# EAGLE board Power module (EAGLE 9.3.1)
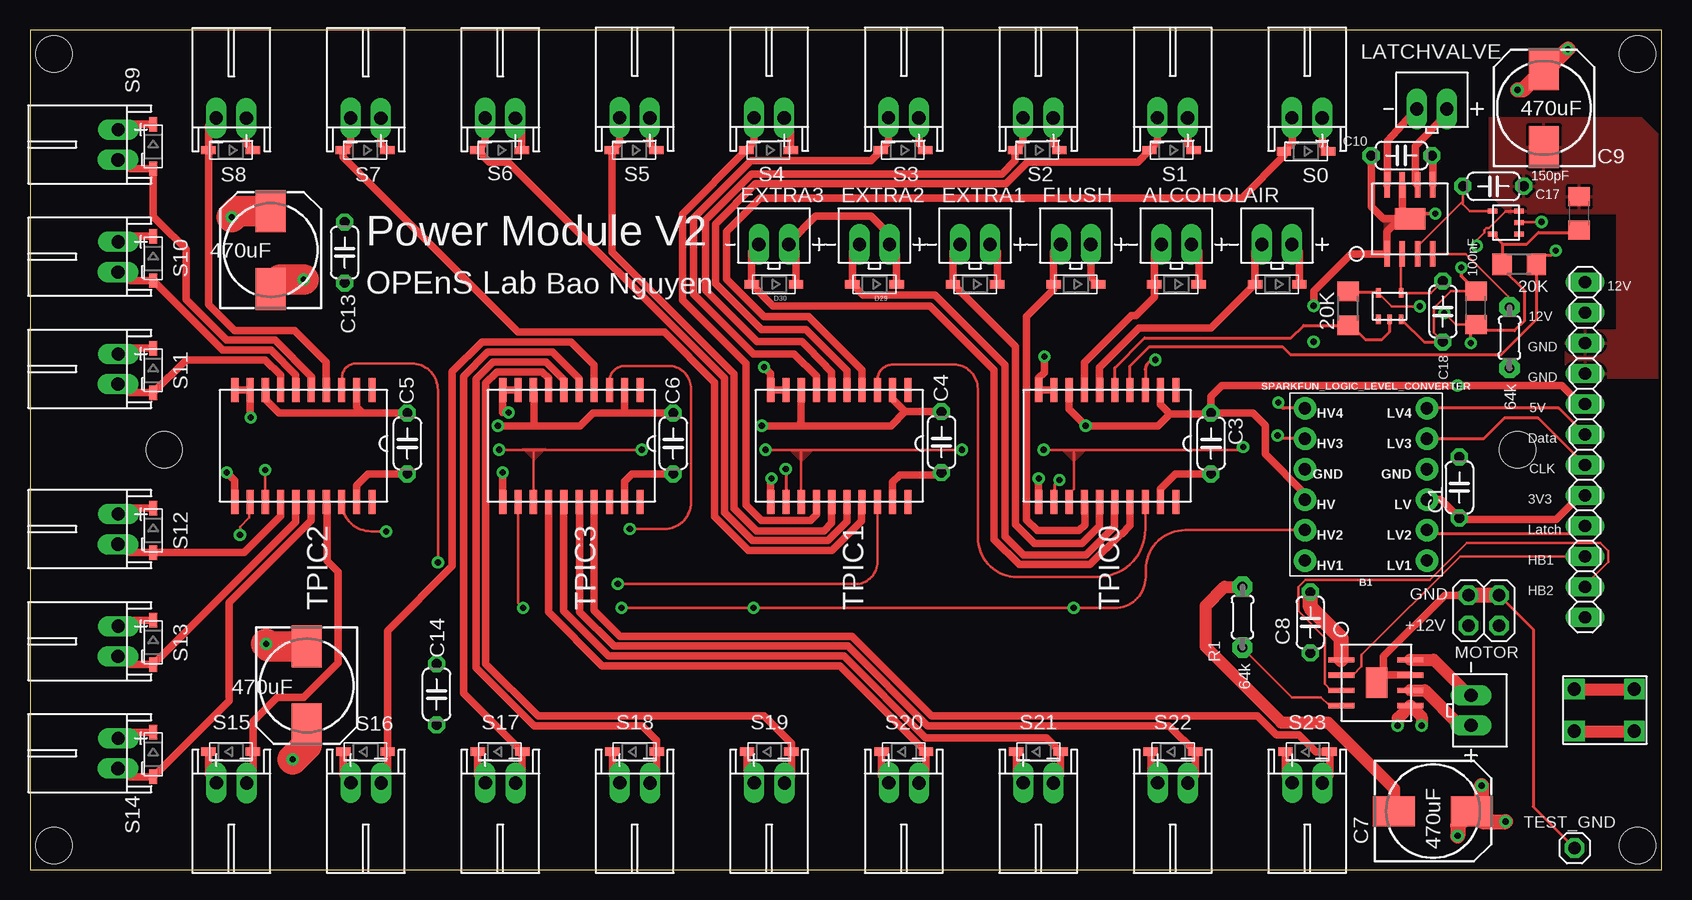
[diagram p0: board, top side]
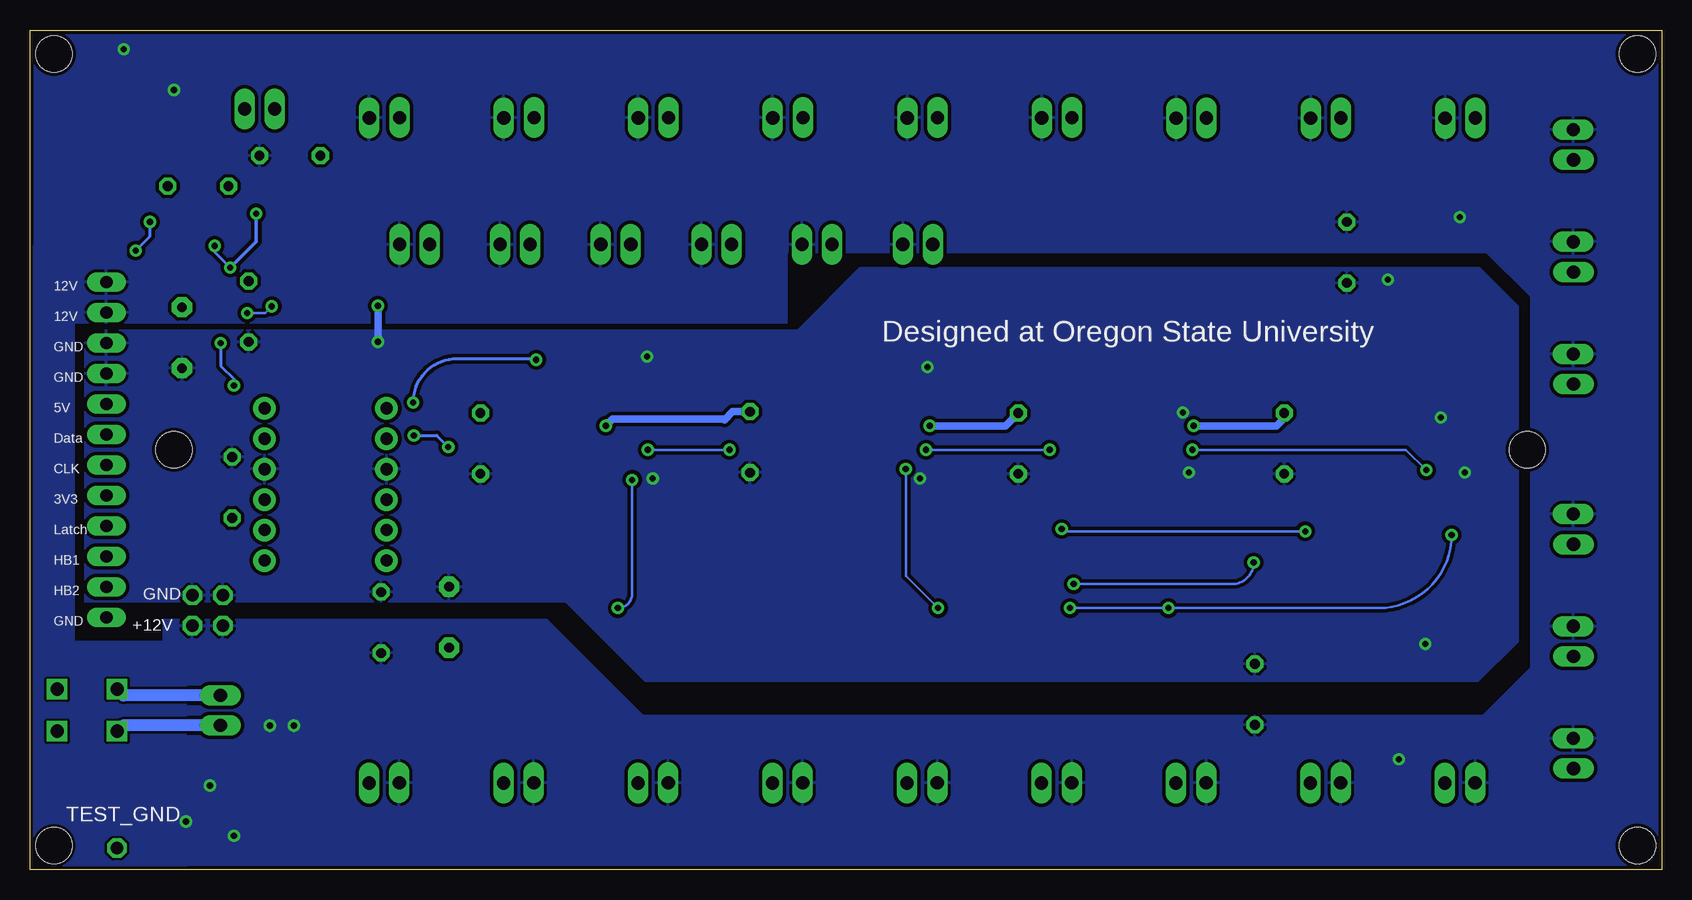
[diagram p1: board, bottom side, seen from below]

Size 136 x 70 mm. Coordinates in mm from the lower left corner, seen from the top.
Outline: 0,0 136,0 136,70 0,70 0,0
Copper layers (1*16): Top 0.035mm / dielectric 1.5mm / Bottom 0.035mm
Design rules "SparkFun": minimum track width 8mil, minimum drill 20mil, track to track 8mil, track to pad 8mil, pad to pad 8mil, via to via 8mil, smd to smd 8mil, copper to edge 10mil, drill to drill 8mil, minimum pad ring 12mil, minimum via ring 10mil, stop-mask expansion 4mil, vias tented up to drill 25mil, thermal gap 10mil
Holes 3 mm at 134,68 134,2 2,2 2,68 11.2,35 124,35

## Footprints (pad centres in the part's own frame; a part is rotated, then mirrored left to right if it is on the bottom)
JST_2POS_2.5MM_UP = drill 1.1 long: 1 -1.25,0; 2 1.25,0
SPARKFUN_LOGIC_LEVEL_CONVERTER = drill 1.016 pad 1.88: GND1 -5.08,-1.27; GND2 5.08,-1.27; HV 5.08,1.27; HV1 5.08,6.35; HV2 5.08,3.81; HV3 5.08,-3.81; HV4 5.08,-6.35; LV -5.08,1.27; LV1 -5.08,6.35; LV2 -5.08,3.81; LV3 -5.08,-3.81; LV4 -5.08,-6.35
C050-024X044 = drill 0.813 octagon: 1 -2.54,0; 2 2.54,0
140CLH-0810 = smd 3.5 x 2.5: + 3.25,0; - -3.25,0
C1206 = smd 1.6 x 1.8: 1 -1.4,0; 2 1.4,0
SOD-123 = smd 1.2 x 0.7: A 1.85,0; C -1.85,0
SOP8 = smd 2.15 x 0.45: 1 -2.54,1.27; 2 -2.54,0; 3 -2.54,-1.27; 4 -2.54,-2.54; 5 3.21,-2.54; 6 3.21,-1.27; 7 3.21,0; 8 3.21,1.27 | smd 1.79 x 2.541: GND 0.381,-0.635
1X12 = drill 1.016 long: 1 -13.97,0; 2 -11.43,0; 3 -8.89,0; 4 -6.35,0; 5 -3.81,0; 6 -1.27,0; 7 1.27,0; 8 3.81,0; 9 6.35,0; 10 8.89,0; 11 11.43,0; 12 13.97,0
2X02 = drill 1.016 octagon: 1 -1.27,-1.27; 2 -1.27,1.27; 3 1.27,-1.27; 4 1.27,1.27
SOT753 = smd 0.8 x 0.4: 1 -1.14,0.95; 2 -1.14,0; 3 -1.14,-0.95; 4 1.06,-0.95; 5 1.06,0.95
0204/5 = drill 0.813 pad 1.676 octagon: 1 -2.54,0; 2 2.54,0
R1206 = smd 1.6 x 1.803: 1 -1.422,0; 2 1.422,0
JST_2POS_2.5MM_ANGLE = drill 1.1 long: 1 1.25,0; 2 -1.27,0.02
1X01 = drill 1.016 octagon: 1 0,0
DIP20 = smd 2 x 0.6: 1 -3.81,5.08; 2 -3.81,3.81; 3 -3.81,2.54; 4 -3.81,1.27; 5 -3.81,0; 6 -3.81,-1.27; 7 -3.81,-2.54; 8 -3.81,-3.81; 9 -3.81,-5.08; 10 -3.81,-6.35; 11 5.49,-6.35; 12 5.49,-5.08; 13 5.49,-3.81; 14 5.49,-2.54; 15 5.49,-1.27; 16 5.49,0; 17 5.49,1.27; 18 5.49,2.54; 19 5.49,3.81; 20 5.49,5.08
3.5MM_DIP2 = drill 1.1 square: 1 -1.778,2.611; 2 -1.778,-2.389; 3 1.722,-2.389; 4 1.722,2.611

## Placement (x,y rotation side)
AIR  2.5MM_JST_UP_2POS  [JST_2POS_2.5MM_UP]  103.95,52.12 0 top
ALCOHOL  2.5MM_JST_UP_2POS  [JST_2POS_2.5MM_UP]  95.56,52.12 0 top
B1  SPARKFUN_LOGIC_LEVEL_CONVERTER  [SPARKFUN_LOGIC_LEVEL_CONVERTER]  111.36,32.11 180 top
C1  100nF  [C050-024X044]  119.15,31.85 90 top
C3  100nF  [C050-024X044]  98.45,35.53 270 top
C4  100nF  [C050-024X044]  75.98,35.63 270 top
C5  100nF  [C050-024X044]  31.45,35.53 270 top
C6  100nF  [C050-024X044]  53.62,35.53 270 top
C7  470uF  [140CLH-0810]  116.95,4.87 0 top
C8  100nF  [C050-024X044]  106.73,20.59 90 top
C9  470uF  [140CLH-0810]  126.2,63.5 90 top
C10  100nF  [C050-024X044]  114.33,59.53 180 top
C11  100nF  [C1206]  120.53,46.83 90 top
C12  100nF  [C1206]  129.13,54.71 90 top
C13  100nF  [C050-024X044]  26.23,51.45 90 top
C14  100nF  [C050-024X044]  33.89,14.6 270 top
C15  470uF  [140CLH-0810]  20.07,51.65 90 top
C16  470uF  [140CLH-0810]  23.07,15.35 270 top
C17  150pF  [C050-024X044]  121.99,56.97 0 top
C18  150pF  [C050-024X044]  117.77,46.53 270 top
D1  [SOD-123]  106.37,59.88 180 top
D2  [SOD-123]  95.17,59.98 180 top
D3  [SOD-123]  83.96,59.98 180 top
D4  [SOD-123]  72.76,59.98 180 top
D5  [SOD-123]  61.55,59.98 180 top
D6  [SOD-123]  50.35,59.98 180 top
D7  [SOD-123]  39.15,59.98 180 top
D8  [SOD-123]  27.94,59.98 180 top
D9  [SOD-123]  16.74,59.98 180 top
D10  [SOD-123]  10.27,60.29 270 top
D11  [SOD-123]  10.27,50.95 270 top
D12  [SOD-123]  10.27,41.61 270 top
D13  [SOD-123]  10.27,28.28 270 top
D14  [SOD-123]  10.27,18.94 270 top
D15  [SOD-123]  10.27,9.6 270 top
D16  [SOD-123]  16.74,9.82 0 top
D17  [SOD-123]  27.96,9.82 0 top
D18  [SOD-123]  39.18,9.82 0 top
D19  [SOD-123]  50.4,9.82 0 top
D20  [SOD-123]  61.62,9.82 0 top
D21  [SOD-123]  72.84,9.82 0 top
D22  [SOD-123]  84.06,9.82 0 top
D23  [SOD-123]  95.28,9.82 0 top
D24  [SOD-123]  106.5,9.82 0 top
D25  [SOD-123]  103.96,48.8 180 top
D26  [SOD-123]  95.57,48.8 180 top
D27  [SOD-123]  87.18,48.8 180 top
D28  [SOD-123]  78.78,48.8 180 top
D29  [SOD-123]  70.39,48.8 180 top
D30  [SOD-123]  62,48.8 180 top
DRV8871  Motor H-Bridge  [SOP8]  111.85,16.21 0 top
DRV8871-2  Latch H  [SOP8]  114.39,53.87 90 top
EXTRA1  2.5MM_JST_UP_2POS  [JST_2POS_2.5MM_UP]  78.78,52.12 0 top
EXTRA2  2.5MM_JST_UP_2POS  [JST_2POS_2.5MM_UP]  70.39,52.12 0 top
EXTRA3  2.5MM_JST_UP_2POS  [JST_2POS_2.5MM_UP]  62,52.12 0 top
FLUSH  2.5MM_JST_UP_2POS  [JST_2POS_2.5MM_UP]  87.17,52.12 0 top
HEADER  Connect to logic  [1X12]  129.63,35 270 top
JP2  [2X02]  121.19,21.6 0 top
LATCHVALVE  Latch valve JST PH  [JST_2POS_2.5MM_UP]  116.86,63.42 0 top
MOTOR  Motor JST PH  [JST_2POS_2.5MM_UP]  120.12,13.26 270 top
NOTGATE1  [SOT753]  122.99,53.94 180 top
NOTGATE2  [SOT753]  113.34,47.01 90 top
R1  64k  [0204/5]  101.07,21.04 270 top
R2  64k  [0204/5]  123.33,44.34 90 top
R3  20K  [R1206]  124.13,50.47 0 top
R4  20K  [R1206]  109.87,46.79 270 top
S0  2.5MM_JST_ANGLE_2POS  [JST_2POS_2.5MM_ANGLE]  106.46,62.67 0 top
S1  2.5MM_JST_ANGLE_2POS  [JST_2POS_2.5MM_ANGLE]  95.25,62.67 0 top
S2  2.5MM_JST_ANGLE_2POS  [JST_2POS_2.5MM_ANGLE]  84.04,62.67 0 top
S3  2.5MM_JST_ANGLE_2POS  [JST_2POS_2.5MM_ANGLE]  72.83,62.67 0 top
S4  2.5MM_JST_ANGLE_2POS  [JST_2POS_2.5MM_ANGLE]  61.62,62.67 0 top
S5  2.5MM_JST_ANGLE_2POS  [JST_2POS_2.5MM_ANGLE]  50.42,62.67 0 top
S6  2.5MM_JST_ANGLE_2POS  [JST_2POS_2.5MM_ANGLE]  39.21,62.64 0 top
S7  2.5MM_JST_ANGLE_2POS  [JST_2POS_2.5MM_ANGLE]  28,62.64 0 top
S8  2.5MM_JST_ANGLE_2POS  [JST_2POS_2.5MM_ANGLE]  16.79,62.64 0 top
S9  2.5MM_JST_ANGLE_2POS  [JST_2POS_2.5MM_ANGLE]  7.36,60.44 90 top
S10  2.5MM_JST_ANGLE_2POS  [JST_2POS_2.5MM_ANGLE]  7.36,51.09 90 top
S11  2.5MM_JST_ANGLE_2POS  [JST_2POS_2.5MM_ANGLE]  7.36,41.74 90 top
S12  2.5MM_JST_ANGLE_2POS  [JST_2POS_2.5MM_ANGLE]  7.36,28.39 90 top
S13  2.5MM_JST_ANGLE_2POS  [JST_2POS_2.5MM_ANGLE]  7.36,19.04 90 top
S14  2.5MM_JST_ANGLE_2POS  [JST_2POS_2.5MM_ANGLE]  7.36,9.69 90 top
S15  2.5MM_JST_ANGLE_2POS  [JST_2POS_2.5MM_ANGLE]  16.79,7.23 180 top
S16  2.5MM_JST_ANGLE_2POS  [JST_2POS_2.5MM_ANGLE]  28,7.23 180 top
S17  2.5MM_JST_ANGLE_2POS  [JST_2POS_2.5MM_ANGLE]  39.21,7.23 180 top
S18  2.5MM_JST_ANGLE_2POS  [JST_2POS_2.5MM_ANGLE]  50.42,7.23 180 top
S19  2.5MM_JST_ANGLE_2POS  [JST_2POS_2.5MM_ANGLE]  61.62,7.23 180 top
S20  2.5MM_JST_ANGLE_2POS  [JST_2POS_2.5MM_ANGLE]  72.83,7.23 180 top
S21  2.5MM_JST_ANGLE_2POS  [JST_2POS_2.5MM_ANGLE]  84.04,7.23 180 top
S22  2.5MM_JST_ANGLE_2POS  [JST_2POS_2.5MM_ANGLE]  95.25,7.23 180 top
S23  2.5MM_JST_ANGLE_2POS  [JST_2POS_2.5MM_ANGLE]  106.46,7.23 180 top
TEST_GND  [1X01]  128.75,1.79 0 top
TPIC0  TPIC6B596  [DIP20]  90.43,36.15 270 top
TPIC1  TPIC6B596  [DIP20]  68.1,36.15 270 top
TPIC2  TPIC6B596  [DIP20]  23.43,36.15 270 top
TPIC3  TPIC6B596  [DIP20]  45.76,36.15 270 top
U$1  Motor Push In  [3.5MM_DIP2]  131.13,13.26 270 top

## Library data of the parts
AIR ALCOHOL DRV8871 DRV8871-2 EXTRA1-EXTRA3 FLUSH LATCHVALVE MOTOR NOTGATE1 NOTGATE2 S0 S1-S23 TPIC0 TPIC1-TPIC3 U$1 = eDNA
B1 = SparkFun-Boards
C1 C3-C18 D1-D30 HEADER R1-R4 = adafruit
JP2 TEST_GND = pinhead

## Nets
+3V3: B1.LV C1.1 HEADER.8
+5V: B1.HV C3.1 C4.1 C5.1 C6.1 C11.1 C12.1 HEADER.5 NOTGATE1.5 NOTGATE2.5 R3.1 R4.1 TPIC0.2 TPIC0.8 TPIC1.2 TPIC1.8 TPIC2.2 TPIC2.8 TPIC3.2 TPIC3.8
+12V: AIR.2 ALCOHOL.2 C7.+ C8.1 C9.+ C10.1 C13.2 C14.2 C15.+ C16.+ D1.C D2.C D3.C D4.C D5.C D6.C D7.C D8.C D9.C D10.C D11.C D12.C D13.C D14.C D15.C D16.C D17.C D18.C D19.C D20.C D21.C D22.C D23.C D24.C D25.C D26.C D27.C D28.C D29.C D30.C DRV8871-2.5 DRV8871.5 EXTRA1.2 EXTRA2.2 EXTRA3.2 FLUSH.2 HEADER.1 HEADER.2 JP2.1 JP2.3 S0.1 S1.1 S2.1 S3.1 S4.1 S5.1 S6.1 S7.1 S8.1 S9.1 S10.1 S11.1 S12.1 S13.1 S14.1 S15.1 S16.1 S17.1 S18.1 S19.1 S20.1 S21.1 S22.1 S23.1
AIR: AIR.1 D25.A TPIC0.6
ALCOHOL: ALCOHOL.1 D26.A TPIC0.7
GND: B1.GND1 B1.GND2 C1.2 C3.2 C4.2 C5.2 C6.2 C7.- C8.2 C9.- C10.2 C11.2 C12.2 C13.1 C14.1 C15.- C16.- C17.2 C18.2 DRV8871-2.1 DRV8871-2.7 DRV8871-2.GND DRV8871.1 DRV8871.7 DRV8871.GND HEADER.3 HEADER.4 JP2.2 JP2.4 NOTGATE1.3 NOTGATE2.3 R1.1 R2.1 TEST_GND.1 TPIC0.9 TPIC0.10 TPIC0.11 TPIC0.19 TPIC1.9 TPIC1.10 TPIC1.11 TPIC1.19 TPIC2.9 TPIC2.10 TPIC2.11 TPIC2.19 TPIC3.9 TPIC3.10 TPIC3.11 TPIC3.19
HB_IN1: DRV8871.2 HEADER.10
HB_IN2: DRV8871.3 HEADER.11
LATCH_H_BRIDGE2: C18.1 DRV8871-2.2 NOTGATE2.4
LATCH_H_BRIGDE1: C17.1 DRV8871-2.3 NOTGATE1.4
LATCHVALVE1: NOTGATE1.2 R3.2 TPIC0.4
LATCHVALVE2: NOTGATE2.2 R4.2 TPIC0.5
MOTOR1: DRV8871.8 MOTOR.1 U$1.1 U$1.2
MOTOR2: DRV8871.6 MOTOR.2 U$1.3 U$1.4
N$1: DRV8871-2.4 R2.2
N$2: DRV8871.4 R1.2
N$3: DRV8871-2.8 LATCHVALVE.1
N$4: DRV8871-2.6 LATCHVALVE.2
S1: D1.A S0.2 TPIC1.4
S2: D2.A S1.2 TPIC1.5
S3: D3.A S2.2 TPIC1.6
S4: D4.A S3.2 TPIC1.7
S5: D5.A S4.2 TPIC1.14
S6: D6.A S5.2 TPIC1.15
S7: D7.A S6.2 TPIC1.16
S8: D8.A S7.2 TPIC1.17
S9: D9.A S8.2 TPIC2.4
S10: D10.A S9.2 TPIC2.5
S11: D11.A S10.2 TPIC2.6
S12: D12.A S11.2 TPIC2.7
S13: D13.A S12.2 TPIC2.14
S14: D14.A S13.2 TPIC2.15
S15: D15.A S14.2 TPIC2.16
S16: D16.A S15.2 TPIC2.17
S17: D17.A S16.2 TPIC3.4
S18: D18.A S17.2 TPIC3.5
S19: D19.A S18.2 TPIC3.6
S20: D20.A S19.2 TPIC3.7
S21: D21.A S20.2 TPIC3.14
S22: D22.A S21.2 TPIC3.15
S23: D23.A S22.2 TPIC3.16
S24: D24.A S23.2 TPIC3.17
SHIFT_CLK: B1.LV3 HEADER.7
SHIFT_DATA: B1.LV4 HEADER.6
SHIFT_LATCH: B1.LV2 HEADER.9
T_DATA: B1.HV4 TPIC0.3
T_DATA1: TPIC0.18 TPIC1.3
T_DATA2: TPIC1.18 TPIC2.3
T_DATA3: TPIC2.18 TPIC3.3
T_RCK: B1.HV2 TPIC0.12 TPIC1.12 TPIC2.12 TPIC3.12
T_SCK: B1.HV3 TPIC0.13 TPIC1.13 TPIC2.13 TPIC3.13
TPIC0_4: D27.A FLUSH.1 TPIC0.14
TPIC0_5: D28.A EXTRA1.1 TPIC0.15
TPIC0_6: D29.A EXTRA2.1 TPIC0.16
TPIC0_7: D30.A EXTRA3.1 TPIC0.17

## Tracks (layer width: path | path; a pad name or v marks a point on that pad's centre or on a via)
+3V3
  Top 0.61: B1.LV 117.62,30.84 C1.1 119.26,29.2 127.24,29.2 129.23,31.19 HEADER.8
+5V  (via drill 0.51)
  Top 0.203: C11.1 118.87,45.43 v117.9,46.4 | v115.84,46.96 113.5,46.96 NOTGATE2.5
  Top 0.254: R3.1 122.79,50.57 | 122.79,50.57 122.79,52.13 | 122.79,52.13 NOTGATE1.5 | R4.1 110.17,48.09 112.37,48.09 NOTGATE2.5 | v120.1,43.9 120.1,45 C11.1 121.03,44.93 123.73,44.93 124.59,45.79 124.59,48.26 122.79,50.06 122.79,50.57 | 122.79,52.13 124.77,52.13 125.75,53.11 128.93,53.11 C12.1
  Top 0.61: C3.1 98.38,38 95,38 | 95,38 94.24,38.76 TPIC0.2 | 95,38 94,37 v88,37 86.62,38.38 TPIC0.8 | v39,37 42,37 | 42,37 45.86,37 46.93,38.07 49.6,38.07 | HEADER.5 129.23,38.81 127.68,40.36 v119,40.36 99.36,40.36 98.45,39.45 C3.1 | C4.1 72.95,38.17 | 72.95,38.17 71.91,39.21 TPIC1.2 | C6.1 50.03,38.07 49.6,38.07 | C5.1 27.73,38.07 | TPIC2.2 27.24,38.56 27.73,38.07 | v61,37 64,37 | 64,37 71.78,37 72.95,38.17 | 64,37 64.29,37.29 TPIC1.8 | TPIC2.8 19.68,39.9 19.68,39.15 20.76,38.07 27.73,38.07 | TPIC3.2 49.57,38.1 49.6,38.07 | 42,37 42,39.91 TPIC3.8 | B1.HV 106.28,31.33 102.98,34.63 102.98,37.02 101.93,38.07 C3.1
  Bottom 0.203: v117.9,46.4 116.4,46.4 v115.84,46.96
  Bottom 0.254: v120.1,43.9 120.1,42 119,40.9 v119,40.36
  Bottom 0.61: v88,37 87.45,37.55 78.15,37.55 78.1,37.5 77.43,38.17 C4.1 | v61,37 54.69,37 C6.1 | v39,37 32.1,37 31.45,37.65 C5.1
+12V  (via drill 0.51)
  Top 0.61: D10.C 8.06,62.14 S9.1 | D11.C 8.07,52.8 S10.1 | D12.C 8.08,43.46 S11.1 | D13.C 8.1,30.13 S12.1 | D14.C 8.11,20.79 S13.1 | D15.C 8.12,11.45 S14.1 | C10.1 116.93,59.47 DRV8871-2.5 | S8.1 18.04,60.53 D9.C | D8.C 29.25,60.52 S7.1 | S5.1 51.67,60.52 D6.C | S3.1 74.08,60.51 D4.C | S2.1 85.29,60.5 D3.C | S1.1 96.5,60.49 D2.C | D1.C 107.71,60.39 S0.1 | D30.C 63.85,51.52 EXTRA3.2 63.25,52.25 65.46,54.46 70.1,54.46 71.64,52.92 EXTRA2.2 72.24,51.27 D29.C | D25.C 105.81,51.51 AIR.2 | D26.C 97.42,51.51 ALCOHOL.2 | D28.C 80.63,51.52 EXTRA1.2 | FLUSH.2 88.42,49.41 D27.C | S15.1 14.89,7.88 D16.C | S16.1 26.11,7.87 D17.C | S17.1 37.33,7.86 D18.C | S18.1 48.55,7.85 D19.C | S19.1 59.77,7.83 D20.C | D21.C 70.99,7.82 S20.1 | D22.C 82.21,7.81 S21.1 | D23.C 93.43,7.8 S22.1 | D24.C 104.65,7.79 S23.1 | S6.1 41,62.1 D7.C | S4.1 63.41,62.14 D5.C
  Top 1.016: v116,12 116,12.73 DRV8871.5 114,12.61 v114,12
  Top 1.27: C7.+ 121,5.67 v121,7 | C7.+ 119,3.67 v119,2.8 | C7.+ 121.07,4 v123,4 | v124,65 124.45,65 C9.+ 126.55,66.75 v128.2,68.4
  Top 2.54: C15.+ 17.3,54.9 v16.8,54.4 | C16.+ 23.07,10.37 v21.9,9.2
  pour Bottom (isolate 0.3): -0.1,69.8 135.9,69.8 135.9,45.6 72.9,45.6 72.9,51.5 14.6,51.5 10.9,47.8 10.9,16.8 14.9,12.8 84.9,12.8 92.9,20.8 124.9,20.8 124.9,-0.2 0.9,-0.2 -0.1,0.8
  pour Bottom: 128,46 128,52 136,52 136,0 123,0 123,19 132.3,19 132.3,46
AIR
  Top 0.61: TPIC0.6 89.16,41.86 92.44,45.14 98.45,45.14 D25.A 102.11,51.53 AIR.1
ALCOHOL
  Top 0.61: TPIC0.7 87.89,42.29 91.8,46.2 92.2,46.2 93.72,47.72 D26.A 93.72,51.53 ALCOHOL.1
GND  (via drill 0.51)
  Top 0.203: C11.2 118.43,48.23 117,46.8 117,44.76 C18.2 | v120.6,52 120.6,52.49 121.22,53.12 121.22,53.32 121.4,53.49 121.61,53.49 123,54.89
  Top 0.254: 123,54.89 NOTGATE1.3 | NOTGATE2.3 114.33,45.87 116.21,43.99 C18.2 | JP2.4 125.3,20.03 125.3,5.24 TEST_GND.1
  Top 0.305: C11.2 119.3,49.46 v119.3,50.2 | v117.14,54.7 115.47,54.7 DRV8871-2.GND
  Top 0.406: 112.87,16.21 DRV8871.GND
  Top 0.61: v107,47 107,48.21 110.12,51.33 DRV8871-2.1 113.12,53.17 114.2,54.25 | JP2.2 117.93,22.87 112.82,17.76 112.82,16.16 112.87,16.21 DRV8871.7 | DRV8871-2.7 114.39,54.89 DRV8871-2.GND 114.2,54.25 | 114.2,54.25 112.8,54.25 111.8,55.26 C10.2 | v39.9,38.1 39.41,38.1 TPIC3.10 TPIC3.9 | TPIC3.11 39.41,33.09 v39.4,33.1 | v61.8,32.6 61.75,32.55 TPIC1.11 | TPIC0.11 84.08,32.59 v84.09,32.6 | TPIC0.19 94.24,31.74 95.49,32.99 C3.2 | v84.56,42.76 84.56,41.44 84.08,40.96 TPIC0.10 TPIC0.9 | TPIC2.19 27.24,32.04 28.19,32.99 C5.2 | TPIC2.10 TPIC2.9 18.35,37.75 v18.4,37.7 | TPIC1.9 TPIC1.10 61.75,41.35 v61.2,41.9 | v16.4,33.12 17.08,32.44 TPIC2.11 | TPIC1.19 71.91,32.31 72.5,32.9 75.79,32.9 C4.2 | C6.2 50.19,32.99 49.57,32.37 TPIC3.19
  Top 1.016: C7.- 113.7,6.76 108.2,12.27 104.31,12.27 98,18.57 98,22 99.58,23.58 R1.1
  Top 1.27: DRV8871.1 109.31,19.28 106.73,21.86 C8.2 | JP2.4 JP2.2
  Top 2.54: v22.8,49.2 20.87,49.2 C15.- | C16.- 19.9,18.6 v19.7,18.8
  Bottom 0.254: v120.6,52 120.6,51.5 v119.3,50.2
  Bottom 0.305: v119.3,50.2 117.14,52.36 v117.14,54.7
  Bottom 0.61: v107,47 v107,44
  pour Top: 121.7,62.7 134.3,62.7 136,61 136,41 129,41 128,42 128,44 129,45 132.3,45 132.3,54.7 123.3,54.7 121.7,56.3
  pour Bottom (isolate 0.3): 131.4,45 72,45 66.8,50.2 15.2,50.2 12,47 12,19 15.3,15.7 84.7,15.7 91.3,22.3 131.4,22.3
  pour Top: 112.4,54.4 112.9,53.9 112.9,53.1 114,54.2 114,54.4
HB_IN1
  Top 0.203: HEADER.10 119.21,26.11 110.99,17.89 110.99,16.93 110.3,16.24 109.34,16.24 DRV8871.2
HB_IN2
  Top 0.203: HEADER.11 129.63,23.72 131.56,25.65 131.56,26.57 130.91,27.23 119.75,27.23 116.67,24.15 106.31,24.15 105.71,23.55 105.71,21.55 107.93,19.33 107.93,15.46 108.45,14.94 DRV8871.3
LATCH_H_BRIDGE2
  Top 0.203: DRV8871-2.2 114.29,51.23 NOTGATE2.4 116.77,48.07 C18.1
LATCH_H_BRIGDE1
  Top 0.203: NOTGATE1.4 120.03,54.89 119.45,55.47 C17.1 119.45,55.71 115.66,51.92 DRV8871-2.3
LATCHVALVE1  (via drill 0.51)
  Top 0.203: v126,54 124.19,54 NOTGATE1.2
  Top 0.254: TPIC0.4 91.7,42 93.3,43.6 104.4,43.6 105.05,42.95 122.65,42.95 125.59,45.89 125.59,50.39 | 125.59,50.39 R3.2 | v127.2,51.6 126.8,51.2 126.1,51.2 126.1,50.9 125.59,50.39
  Bottom 0.254: v127.2,51.6 126,52.8 v126,54
LATCHVALVE2
  Top 0.203: 113.34,45.79 NOTGATE2.2
  Top 0.254: TPIC0.5 90.43,41.83 92.92,44.32 105.12,44.32 106.17,45.37 R4.2 110.13,45.37 111.3,44.2 112.7,44.2 113.34,44.84 113.34,45.79
MOTOR1
  Top 1.016: DRV8871.8 117.02,17.48 119.99,14.51 MOTOR.1 | U$1.2 U$1.1
  Bottom 1.016: MOTOR.1 128.21,14.51 U$1.2
MOTOR2
  Top 1.016: DRV8871.6 116.26,14.94 119.08,12.12 MOTOR.2 | U$1.3 U$1.4
  Bottom 1.016: MOTOR.2 128.27,12.01 U$1.3
N$1
  Top 0.203: DRV8871-2.4 116.96,51.3 119.7,51.3 123.24,47.76 R2.2
N$2
  Top 0.203: R1.2 105.2,14.37 107.61,14.37 108.31,13.67 DRV8871.4
N$3
  Top 0.61: LATCHVALVE.1 113.16,60.73 113.16,57.22 113.12,57.18 DRV8871-2.8
N$4
  Top 0.61: DRV8871-2.6 115.46,57.28 115.46,60.32 117.86,62.72 LATCHVALVE.2
S1
  Top 0.61: S0.2 105.21,60.57 D1.A 104.52,59.52 101,56 60.85,56 58.04,53.19 58.04,49.24 61.19,46.09 64.91,46.09 69.37,41.63 TPIC1.4
S2
  Top 0.61: S1.2 93.98,60.65 D2.A 92.34,59 83.15,59 81.34,57.19 60.49,57.19 57.13,53.83 57.13,48.87 60.97,45.03 64.67,45.03 68.1,41.6 TPIC1.5
S3
  Top 0.61: S2.2 82.77,60.64 D3.A 82.11,59.11 81,58 60.15,58 56.3,54.15 56.3,48.3 60.59,44.01 64.34,44.01 66.37,41.98 66.37,41.93 66.8,41.5 66.8,39.99 TPIC1.6
S4
  Top 0.61: S3.2 71.56,60.63 D4.A 70.91,59.91 70.11,59.12 60.12,59.12 55.3,54.3 55.3,48 60.3,43 63.7,43 65.56,41.14 TPIC1.7
S5
  Top 0.61: TPIC1.14 65.56,29.58 65.08,29.1 61,29.1 59.68,30.42 59.68,42.18 54.39,47.47 54.39,54.67 D5.A 60.35,60.63 S4.2
S6
  Top 0.61: TPIC1.15 66.82,28.88 66.18,28.24 60.58,28.24 58.7,30.12 58.7,41.3 48.5,51.49 D6.A 49.15,60.62 S5.2
S7
  Top 0.61: S6.2 37.94,60.62 D7.A 38.28,59 39.85,59 57.89,40.96 57.89,29.79 60.24,27.43 66.52,27.43 68.1,29.01 TPIC1.16
S8
  Top 0.61: S7.2 26.73,60.62 D8.A 26.09,59.41 40.69,44.81 52.88,44.81 57.07,40.62 57.07,29.45 59.91,26.61 66.86,26.61 69.31,29.07 69.31,30.61 TPIC1.17
S9
  Top 0.61: S8.2 14.89,62.03 D9.A 14.89,47.11 17.06,44.94 22.06,44.94 24.7,42.3 TPIC2.4
S10
  Top 0.61: S9.2 8.36,58.44 D10.A 10.27,54.44 10.8,53.91 10.83,53.91 13,51.74 13,47.52 16.4,44.13 20.42,44.13 23.47,41.08 23.47,40 TPIC2.5
S11
  Top 0.61: S10.2 8.35,49.1 D11.A 16.06,43.31 20.09,43.31 22.16,41.24 TPIC2.6
S12
  Top 0.61: S11.2 8.34,39.76 D12.A 13.01,42.5 19.6,42.5 20.89,41.21 TPIC2.7
S13
  Top 0.61: S12.2 8.32,26.43 D13.A 17.86,26.43 20.89,29.46 TPIC2.14
S14
  Top 0.61: S13.2 8.31,17.09 D14.A 22.16,28.98 TPIC2.15
S15
  Top 0.61: S14.2 8.3,7.75 D15.A 16.6,14.08 16.6,22.27 23.43,29.1 TPIC2.16
S16
  Top 0.61: S15.2 18.59,7.74 D16.A 18.59,12.34 20.61,14.36 22.83,14.36 25.7,17.23 25.7,24.81 24.76,25.75 24.76,30.6 TPIC2.17
S17
  Top 0.61: S16.2 29.81,7.75 D17.A 29.81,19.91 35.2,25.3 35.2,41.51 37.69,44 45.1,44 47.03,42.07 TPIC3.4
S18
  Top 0.61: S17.2 41.03,7.76 D18.A 36.16,14.69 36.16,41.12 38.16,43.13 43.57,43.13 45.76,40.94 TPIC3.5
S19
  Top 0.61: S18.2 52.25,7.77 D19.A 52.25,10.75 51,12 42,12 37.17,16.83 37.17,40.89 38.6,42.31 43.04,42.31 43.58,41.77 | 43.58,41.77 | 43.58,41.77 44.49,40.86 TPIC3.6
S20
  Top 0.61: S19.2 63.47,7.79 D20.A 63.47,10.53 61.19,12.81 42.34,12.81 37.98,17.16 37.98,40.55 38.94,41.5 42.7,41.5 43.22,40.98 TPIC3.7
S21
  Top 0.61: TPIC3.14 43.24,30.65 43.24,21.46 47.7,17 67.51,17 D21.A 74.69,7.8 S20.2
S22
  Top 0.61: S21.2 85.91,7.81 D22.A 84.73,11 74.66,11 67.85,17.81 48.24,17.81 44.49,21.56 TPIC3.15
S23
  Top 0.61: S22.2 97.13,7.82 D23.A 94.95,12 74.81,12 68.18,18.63 48.67,18.63 45.83,21.47 45.83,30.6 TPIC3.16
S24
  Top 0.61: S23.2 108.35,7.83 D24.A 107.18,9.82 105.75,11.25 103.88,11.25 102.32,12.81 75.15,12.81 68.52,19.44 49.2,19.44 47.04,21.6 47.04,30.54 47.03,30.54 TPIC3.17
SHIFT_CLK
  Top 0.254: B1.LV3 116.46,35.9 121.16,35.9 122.91,37.64 125.72,37.64 HEADER.7
SHIFT_DATA
  Top 0.254: HEADER.6 127.43,38.47 B1.LV4
SHIFT_LATCH
  Top 0.254: B1.LV2 116.74,28 128.98,28 HEADER.9
T_DATA  (via drill 0.51)
  Top 0.254: B1.HV4 104.54,38.46 arc-90 v104.05,38.95 | v93.8,42.5 arc90 92.97,41.67 TPIC0.3
  Bottom 0.254: v104.05,38.95 arc90 100.4,42.6 93.9,42.6 v93.8,42.5
T_DATA1
  Top 0.203: TPIC0.18 92.97,28.37 arc-90 89,24.4 82.3,24.4 arc-90 79,27.7 79,40.1 arc90 77,42.1 71.94,42.1 arc90 70.64,40.8
  Top 0.254: 70.64,40.8 TPIC1.3
T_DATA2  (via drill 0.51)
  Top 0.203: TPIC1.18 70.64,25.64 arc-90 68.8,23.8 v49,23.8 | v34,25.6 34,40 arc90 31.8,42.2 27.2,42.2 arc90 26,41 26,39.99 arc-90 TPIC2.3
  Bottom 0.203: v49,23.8 35.8,23.8 arc-90 v34,25.6
T_DATA3  (via drill 0.51)
  Top 0.203: v50,28.4 52.9,28.4 arc90 55.1,30.6 55.1,40.1 arc90 53.2,42 49.6,42 arc90 48.3,40.7 TPIC3.3 | TPIC2.18 arc90 28.43,28.2 v29.7,28.2
  Bottom 0.203: v50,28.4 49.8,28.2 v29.7,28.2
T_RCK  (via drill 0.51)
  Top 0.203: B1.HV2 96.3,28.3 arc90 93,25 93,24.4 arc-90 90.4,21.8 v87,21.8 v60.3,21.8 v49.3,21.8 | TPIC3.12 40.68,22.22 v41.1,21.8 | v17.5,27.9 17.5,28.55 18.29,29.33 18.29,30.59 TPIC2.12
  Top 0.254: v85.8,32.49 85.4,32.09 85.4,31.6 85.35,31.55 TPIC0.12 | v63,33.4 63,30.68 TPIC1.12
  Bottom 0.203: v87,21.8 arc-90 85.8,23 v85.8,32.49 | v63,33.4 63,24.5 v60.3,21.8 | v49.3,21.8 v41.1,21.8 23.6,21.8 arc-90 v17.5,27.9
T_SCK  (via drill 0.51)
  Top 0.203: 100.9,35 87,35 | 87,35 v84.5,35 | 41.96,35 41.96,30.67 | v39.1,35 41.96,35 | 87,35 87,31.74 86.62,31.36 | v61.3,35 64.29,35 | 64.29,35 v77.7,35 | 64.29,35 TPIC1.13 | v19.6,33.3 19.6,30.68 TPIC2.13 | v51,35 41.96,35
  Top 0.254: B1.HV3 104.28,35.92 v104,36.2 | v101.13,35.23 100.9,35 | TPIC3.13 41.96,30.67 | 86.62,31.36 TPIC0.13
  Bottom 0.203: v84.5,35 v77.7,35 | v39.1,35 21.3,35 v19.6,33.3 | v61.3,35 v51,35
  Bottom 0.254: v104,36.2 102.1,36.2 v101.13,35.23
  pour Top: 41,35.1 42,34.1 43,35.1
  pour Top: 86,35 87,34 88,35
  pour Top: 63.3,35 64.3,34 65.3,35
TPIC0_4
  Top 0.61: FLUSH.1 85.33,51.53 D27.A 85.33,48.35 83.08,46.1 83.08,29.15 83.97,28.25 87.43,28.25 87.93,28.75 87.93,30.62 TPIC0.14
TPIC0_5
  Top 0.61: EXTRA1.1 76.93,51.52 D28.A 82.13,43.61 82.13,28.79 83.72,27.2 87.7,27.2 89.16,28.66 TPIC0.15
TPIC0_6
  Top 0.61: EXTRA2.1 68.54,51.52 D29.A 69.44,47.9 75.44,47.9 81.26,42.08 81.26,27.77 82.8,26.24 88.04,26.24 90.4,28.6 90.4,30.63 TPIC0.16
TPIC0_7
  Top 0.61: EXTRA3.1 60.15,51.52 D30.A 61.95,47 75,47 80.35,41.65 80.35,27.54 82.46,25.43 88.38,25.43 90.95,28 91,28 91.7,28.7 TPIC0.17

## Text on the board
tPlace: C17 | Power Module V2 | 470uF | OPEnS Lab | Bao Nguyen | 12V | 12V | GND | GND | 64k | 5V | Data | CLK | 3V3 | Latch | HB1 | HB2 | GND | +12V | 470uF
bPlace: 12V | 12V | Designed at Oregon State University | GND | GND | 5V | Data | CLK | 3V3 | Latch | HB1 | HB2 | GND | +12V | GND | TEST_GND